# Altium PCB 100861.pcbdoc (part 1 of 2)
Units mm, origin at the board's own origin, x right, y up, seen from the top; angles counter-clockwise.
Board outline 64 x 17.5 mm, 4 copper layers (Top Layer, Ground, Power, Bottom Layer), stack 1.551 mm thick; 99 components, 69 nets, 422 pads, 178 vias.
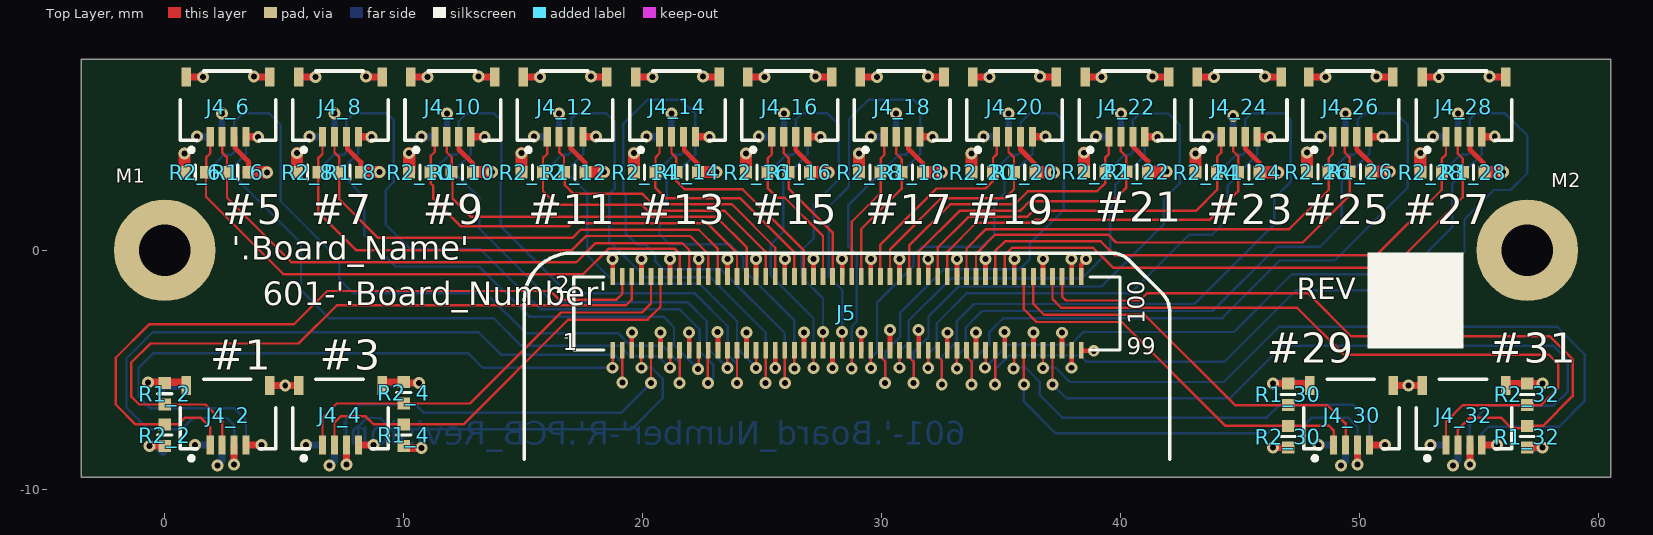
[diagram p0: Top Layer view]
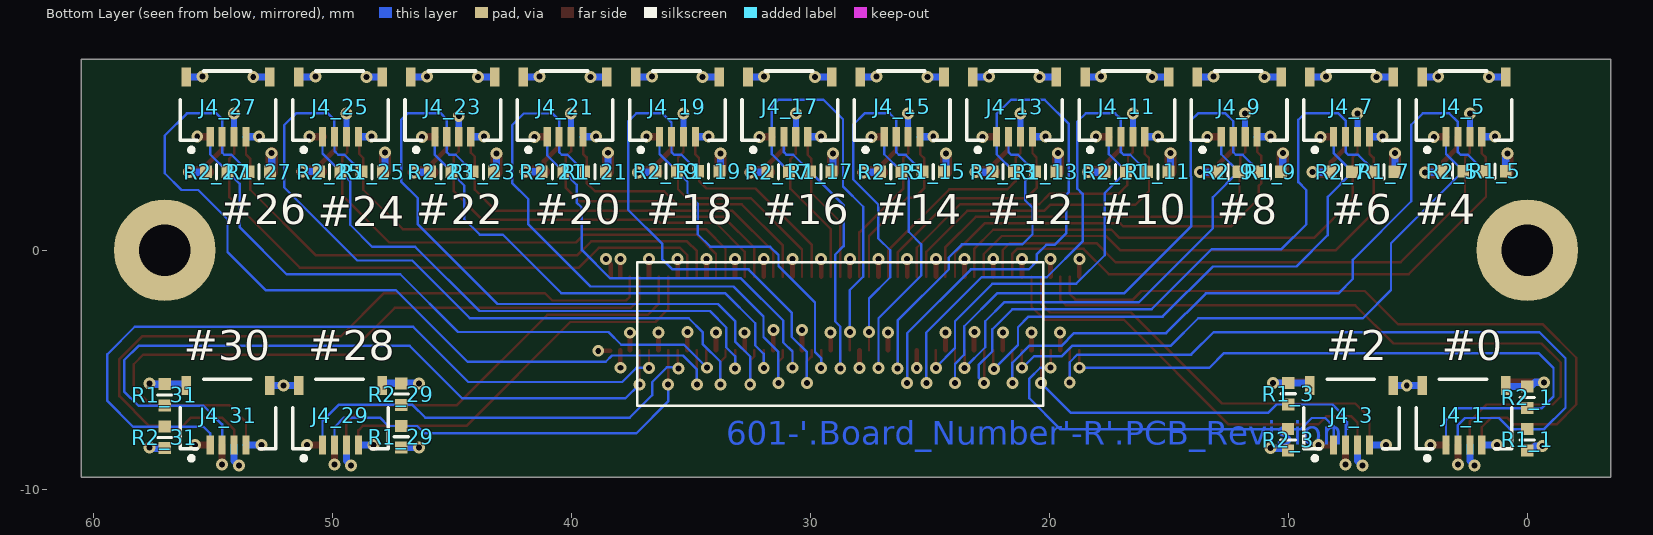
[diagram p1: Bottom Layer view, seen from below]
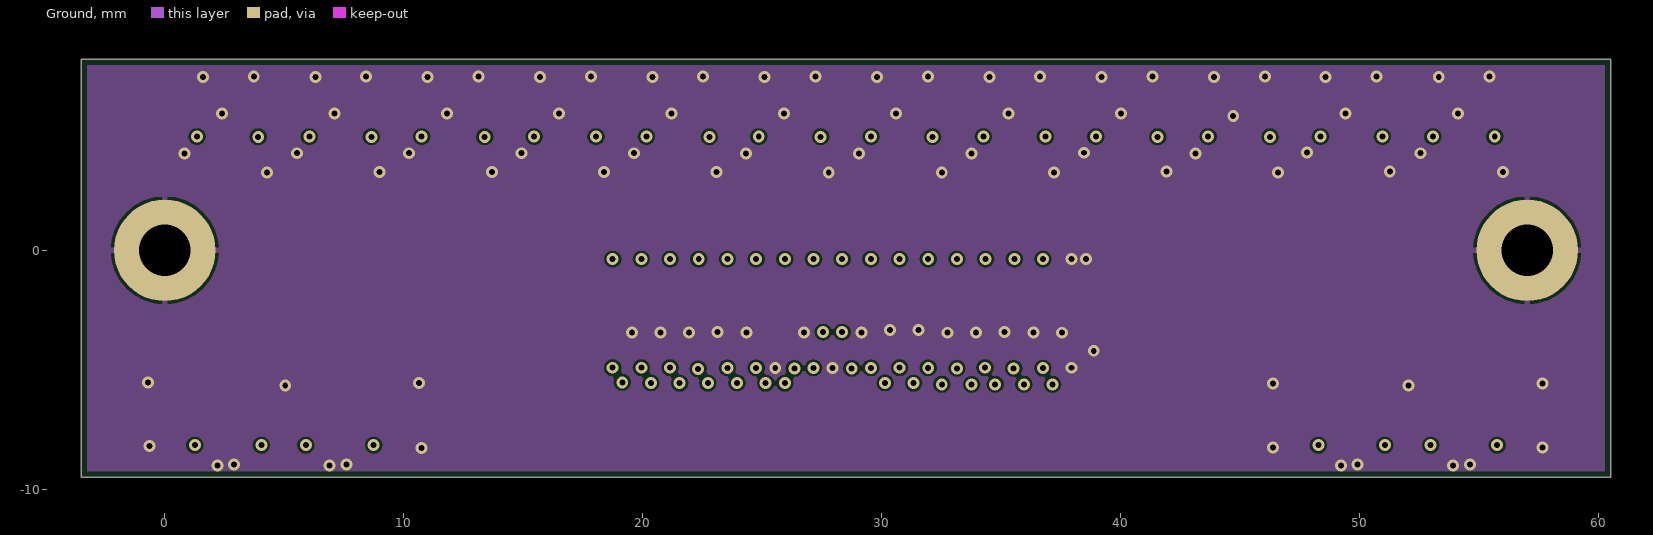
[diagram p2: Ground]
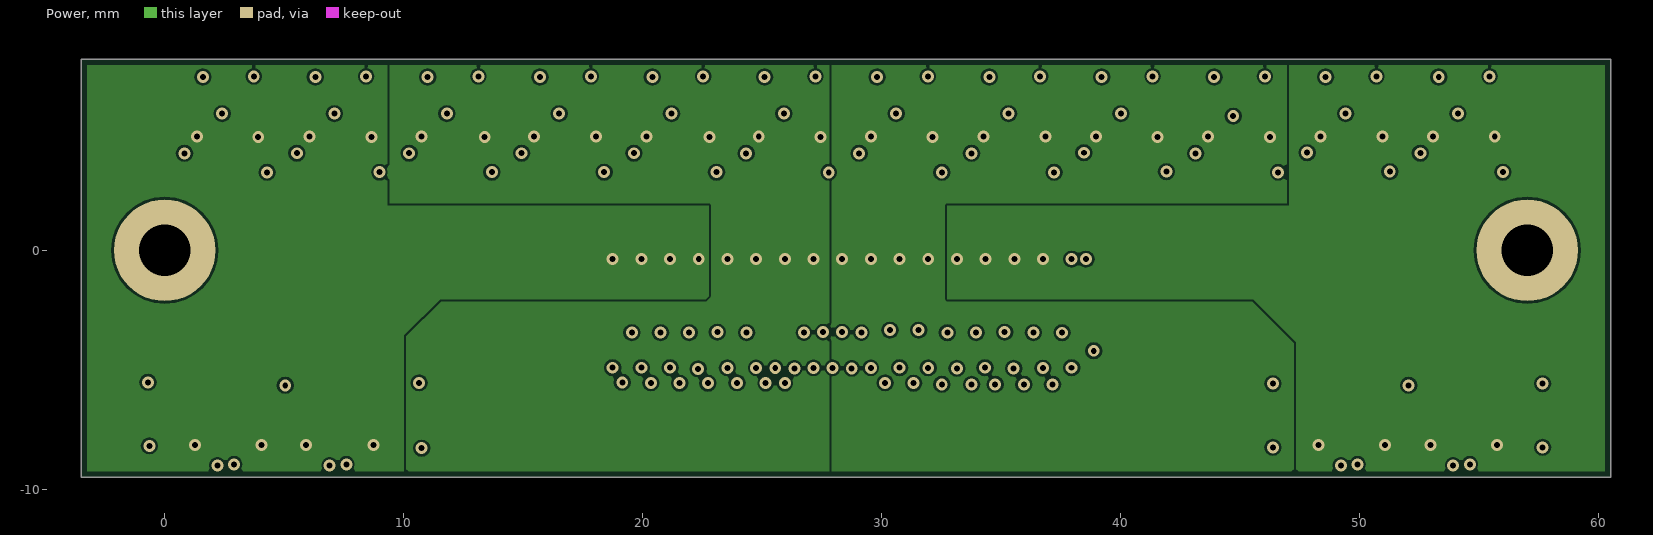
[diagram p3: Power]

## Layer stack, top to bottom
Top Solder: solder mask 0.0102, Solder Resist, Dk 3.5
Top Layer: signal copper 0.0356
Dielectric 1: core 0.254, FR-4, Dk 4.2
Ground: signal copper 0.036
Dielectric 3: prepreg 0.9, Dk 4.2
Power: signal copper 0.036
Dielectric 2: core 0.254, Dk 4.2
Bottom Layer: signal copper 0.0356
Bottom Solder: solder mask 0.0102, Solder Resist, Dk 3.5

## Board outline
-3.5,-9.5 60.5,-9.5 60.5,8 -3.5,8

## Design rules (kind name [scope] priority, off if disabled: settings)
AssemblyTestPointUsage [All] p1 off:
AssemblyTestpoint [All] p1 off: testpointundercomponent=TRUE minsize=1.016 maxsize=2.54 preferedsize=1.524 minholesize=0 maxholesize=1.016 preferedholesize=0.813 testpointgrid=0.025 usegrid=TRUE gridtolerance=0 allowsidetop=TRUE allowsidebottom=TRUE
BoardOutlineClearance [All] p1: gap=0.25 except(0: Text-OutlineEdge)
Clearance Clearance_1 [InNamedPolygon('VCC_3V3_CORE') vs InNet('GND')] p1: gap=0.254
Clearance PWR [OnLayer('Power')] p2: gap=0.2
Clearance ANT_PIN [InPadClass('RADIO_PIN')] p3: gap=0.25
Clearance Keepout_clear [IsKeepOut vs OnLayer('Top Layer')] p4: gap=0
Clearance Polygon_Clearance [InPolygon] p5: gap=0.1
Clearance Narrow_clearance [InNetClass('Narrow')] p6: gap=0.08
Clearance RF_Clearance [InNetClass('RF')] p7: gap=0.125
Clearance [All] p8: gap=0.1 except(0: Arc-Region Track-Region SMDPad-Region THPad-Region Via-Region Fill-Region Region-Region)
ComponentClearance [All] p1: gap=0.18 collisioncheckmode=3 verticalgap=0.18 showdistances=FALSE
DiffPairsRouting [All] p1: maxlimit=0.152 minlimit=0.152 mostfreqgap=0.152 toplayer_minwidth=0.25 toplayer_maxwidth=0.318 toplayer_prefwidth=0.318 midlayer1_minwidth=0.25 midlayer1_maxwidth=0.318 midlayer1_prefwidth=0.318 midlayer2_minwidth=0.25 midlayer2_maxwidth=0.318 midlayer2_prefwidth=0.318 bottomlayer_minwidth=0.25 bottomlayer_maxwidth=0.318 bottomlayer_prefwidth=0.318 maxuncoupledlength=12.7
FabricationTestPointUsage [All] p1 off: valid=0 allowmultiple=FALSE
FabricationTestpoint [All] p1 off: side=3 testpointundercomponent=TRUE minsize=1.016 maxsize=2.54 preferedsize=1.524 minholesize=0 maxholesize=1.016 preferedholesize=0.813 testpointgrid=0.025 allowsidetop=TRUE allowsidebottom=TRUE usegrid=TRUE gridtolerance=0
HoleSize [All] p1: absolutevalues=TRUE maxlimit=3.5 minlimit=0.025 maxpercent=80.000 minpercent=20.000
MinimumSolderMaskSliver MinimumSolderMaskSliver_1 [isvia vs IsPad] p1: minsoldermaskwidth=0
MinimumSolderMaskSliver [All] p2: minsoldermaskwidth=0.05
PlaneClearance [All] p1: clearance=0.25
PlaneConnect [All] p1: planeconnectstyle=Direct reliefexpansion=0.508 reliefentries=4 reliefconductorwidth=0.254 reliefairgap=0.254
PolygonConnect MTG_CONNECT [HasFootprint('standoff_hole2p50p')] p1: connectstyle=Relief reliefconductorwidth=0.4 reliefentries=4 polygonreliefangle="90 Angle" airgapwidth=0.25
PolygonConnect THPin [All vs InPadClass('THPin_Polygon')] p2: connectstyle=Relief reliefconductorwidth=0.254 reliefentries=4 polygonreliefangle="90 Angle" airgapwidth=0.254
PolygonConnect POLY_VIA [IsVia vs IsPolygon] p3: connectstyle=Direct reliefconductorwidth=0.254 reliefentries=4 polygonreliefangle="90 Angle" airgapwidth=0.254
PolygonConnect [All] p4: connectstyle=Relief reliefconductorwidth=0.25 reliefentries=4 polygonreliefangle="90 Angle" airgapwidth=0.125
RoomDefinition U_SensorConn320 [InComponentClass('U_SensorConn320')] p1: confinementstyle=ConfineIn formatcopy=TRUE lockcomponents=FALSE outline -388.768,-211.633 -337.968,-211.633 -337.968,-186.233 -388.768,-186.233
RoomDefinition SensorBreakout [InComponentClass('SensorBreakout')] p2: confinementstyle=ConfineIn formatcopy=TRUE lockcomponents=FALSE outline -388.768,-211.633 -337.968,-211.633 -337.968,-186.233 -388.768,-186.233
RoomDefinition U_SensorConn432 [InComponentClass('U_SensorConn432')] p3: confinementstyle=ConfineIn formatcopy=TRUE lockcomponents=FALSE outline -388.768,-211.633 -337.968,-211.633 -337.968,-186.233 -388.768,-186.233
RoomDefinition U_SensorConn431 [InComponentClass('U_SensorConn431')] p4: confinementstyle=ConfineIn formatcopy=TRUE lockcomponents=FALSE outline -388.768,-211.633 -337.968,-211.633 -337.968,-186.233 -388.768,-186.233
RoomDefinition U_SensorConn430 [InComponentClass('U_SensorConn430')] p5: confinementstyle=ConfineIn formatcopy=TRUE lockcomponents=FALSE outline -388.768,-211.633 -337.968,-211.633 -337.968,-186.233 -388.768,-186.233
RoomDefinition U_SensorConn429 [InComponentClass('U_SensorConn429')] p6: confinementstyle=ConfineIn formatcopy=TRUE lockcomponents=FALSE outline -388.768,-211.633 -337.968,-211.633 -337.968,-186.233 -388.768,-186.233
RoomDefinition U_SensorConn428 [InComponentClass('U_SensorConn428')] p7: confinementstyle=ConfineIn formatcopy=TRUE lockcomponents=FALSE outline -388.768,-211.633 -337.968,-211.633 -337.968,-186.233 -388.768,-186.233
RoomDefinition U_SensorConn427 [InComponentClass('U_SensorConn427')] p8: confinementstyle=ConfineIn formatcopy=TRUE lockcomponents=FALSE outline -388.768,-211.633 -337.968,-211.633 -337.968,-186.233 -388.768,-186.233
RoomDefinition U_SensorConn426 [InComponentClass('U_SensorConn426')] p9: confinementstyle=ConfineIn formatcopy=TRUE lockcomponents=FALSE outline -388.768,-211.633 -337.968,-211.633 -337.968,-186.233 -388.768,-186.233
RoomDefinition U_SensorConn425 [InComponentClass('U_SensorConn425')] p10: confinementstyle=ConfineIn formatcopy=TRUE lockcomponents=FALSE outline -388.768,-211.633 -337.968,-211.633 -337.968,-186.233 -388.768,-186.233
RoomDefinition U_SensorConn324 [InComponentClass('U_SensorConn324')] p11: confinementstyle=ConfineIn formatcopy=TRUE lockcomponents=FALSE outline -388.768,-211.633 -337.968,-211.633 -337.968,-186.233 -388.768,-186.233
RoomDefinition U_SensorConn323 [InComponentClass('U_SensorConn323')] p12: confinementstyle=ConfineIn formatcopy=TRUE lockcomponents=FALSE outline -388.768,-211.633 -337.968,-211.633 -337.968,-186.233 -388.768,-186.233
RoomDefinition U_SensorConn322 [InComponentClass('U_SensorConn322')] p13: confinementstyle=ConfineIn formatcopy=TRUE lockcomponents=FALSE outline -388.768,-211.633 -337.968,-211.633 -337.968,-186.233 -388.768,-186.233
RoomDefinition U_SensorConn321 [InComponentClass('U_SensorConn321')] p14: confinementstyle=ConfineIn formatcopy=TRUE lockcomponents=FALSE outline -388.768,-211.633 -337.968,-211.633 -337.968,-186.233 -388.768,-186.233
RoomDefinition U_SensorConn319 [InComponentClass('U_SensorConn319')] p15: confinementstyle=ConfineIn formatcopy=TRUE lockcomponents=FALSE outline -388.768,-211.633 -337.968,-211.633 -337.968,-186.233 -388.768,-186.233
RoomDefinition U_SensorConn318 [InComponentClass('U_SensorConn318')] p16: confinementstyle=ConfineIn formatcopy=TRUE lockcomponents=FALSE outline -388.768,-211.633 -337.968,-211.633 -337.968,-186.233 -388.768,-186.233
RoomDefinition U_SensorConn317 [InComponentClass('U_SensorConn317')] p17: confinementstyle=ConfineIn formatcopy=TRUE lockcomponents=FALSE outline -388.768,-211.633 -337.968,-211.633 -337.968,-186.233 -388.768,-186.233
RoomDefinition U_SensorConn216 [InComponentClass('U_SensorConn216')] p18: confinementstyle=ConfineIn formatcopy=TRUE lockcomponents=FALSE outline -388.768,-211.633 -337.968,-211.633 -337.968,-186.233 -388.768,-186.233
RoomDefinition U_SensorConn215 [InComponentClass('U_SensorConn215')] p19: confinementstyle=ConfineIn formatcopy=TRUE lockcomponents=FALSE outline -388.768,-211.633 -337.968,-211.633 -337.968,-186.233 -388.768,-186.233
RoomDefinition U_SensorConn214 [InComponentClass('U_SensorConn214')] p20: confinementstyle=ConfineIn formatcopy=TRUE lockcomponents=FALSE outline -388.768,-211.633 -337.968,-211.633 -337.968,-186.233 -388.768,-186.233
RoomDefinition U_SensorConn213 [InComponentClass('U_SensorConn213')] p21: confinementstyle=ConfineIn formatcopy=TRUE lockcomponents=FALSE outline -388.768,-211.633 -337.968,-211.633 -337.968,-186.233 -388.768,-186.233
RoomDefinition U_SensorConn212 [InComponentClass('U_SensorConn212')] p22: confinementstyle=ConfineIn formatcopy=TRUE lockcomponents=FALSE outline -388.768,-211.633 -337.968,-211.633 -337.968,-186.233 -388.768,-186.233
RoomDefinition U_SensorConn211 [InComponentClass('U_SensorConn211')] p23: confinementstyle=ConfineIn formatcopy=TRUE lockcomponents=FALSE outline -388.768,-211.633 -337.968,-211.633 -337.968,-186.233 -388.768,-186.233
RoomDefinition U_SensorConn210 [InComponentClass('U_SensorConn210')] p24: confinementstyle=ConfineIn formatcopy=TRUE lockcomponents=FALSE outline -388.768,-211.633 -337.968,-211.633 -337.968,-186.233 -388.768,-186.233
RoomDefinition U_SensorConn29 [InComponentClass('U_SensorConn29')] p25: confinementstyle=ConfineIn formatcopy=TRUE lockcomponents=FALSE outline -388.768,-211.633 -337.968,-211.633 -337.968,-186.233 -388.768,-186.233
RoomDefinition U_SensorConn18 [InComponentClass('U_SensorConn18')] p26: confinementstyle=ConfineIn formatcopy=TRUE lockcomponents=FALSE outline -388.768,-211.633 -337.968,-211.633 -337.968,-186.233 -388.768,-186.233
RoomDefinition U_SensorConn17 [InComponentClass('U_SensorConn17')] p27: confinementstyle=ConfineIn formatcopy=TRUE lockcomponents=FALSE outline -388.768,-211.633 -337.968,-211.633 -337.968,-186.233 -388.768,-186.233
RoomDefinition U_SensorConn16 [InComponentClass('U_SensorConn16')] p28: confinementstyle=ConfineIn formatcopy=TRUE lockcomponents=FALSE outline -388.768,-211.633 -337.968,-211.633 -337.968,-186.233 -388.768,-186.233
RoomDefinition U_SensorConn15 [InComponentClass('U_SensorConn15')] p29: confinementstyle=ConfineIn formatcopy=TRUE lockcomponents=FALSE outline -388.768,-211.633 -337.968,-211.633 -337.968,-186.233 -388.768,-186.233
RoomDefinition U_SensorConn14 [InComponentClass('U_SensorConn14')] p30: confinementstyle=ConfineIn formatcopy=TRUE lockcomponents=FALSE outline -388.768,-211.633 -337.968,-211.633 -337.968,-186.233 -388.768,-186.233
RoomDefinition U_SensorConn13 [InComponentClass('U_SensorConn13')] p31: confinementstyle=ConfineIn formatcopy=TRUE lockcomponents=FALSE outline -388.768,-211.633 -337.968,-211.633 -337.968,-186.233 -388.768,-186.233
RoomDefinition U_SensorConn12 [InComponentClass('U_SensorConn12')] p32: confinementstyle=ConfineIn formatcopy=TRUE lockcomponents=FALSE outline -388.768,-211.633 -337.968,-211.633 -337.968,-186.233 -388.768,-186.233
RoomDefinition U_SensorConn11 [InComponentClass('U_SensorConn11')] p33: confinementstyle=ConfineIn formatcopy=TRUE lockcomponents=FALSE outline -388.768,-211.633 -337.968,-211.633 -337.968,-186.233 -388.768,-186.233
RoutingVias [All] p1: holewidth=0.25 width=0.5 viastyle="Through Hole" minholewidth=0.25 minwidth=0.5 maxholewidth=0.25 maxwidth=0.5 useviatemplates=TRUE viatemplateguid#1={2D41CD12-448D-474D-BA40-36D4687D2B42} viatemplatename#1=v50h25m0mx0
SilkToSilkClearance [All] p1 off: silktosilkclearance=0
SilkToSolderMaskClearance [IsPad] p1: minsilkscreentomaskgap=0.05 clearancetoexposedcopper=TRUE
SolderMaskExpansion [All] p1: expansion=0.05
Width Narrow [InNetClass('Narrow')] p1: maxlimit=0.1 minlimit=0.08 preferedwidth=0.1
Width RF_Width [InNetClass('RF')] p2: maxlimit=0.59 minlimit=0.2 preferedwidth=0.59
Width PWR_GND [InNetClass('PWR_GND')] p3: maxlimit=1 minlimit=0.2 preferedwidth=0.3
Width CRITICAL [InNetClass('MOTOR_DRIVERS')] p4: maxlimit=0.4 minlimit=0.3 preferedwidth=0.4
Width [All] p5: maxlimit=0.508 minlimit=0.1 preferedwidth=0.1
18 further rules are at their usual default settings.

## Classes and differential pairs
component class U_SensorConn11: J4_1 R1_1 R2_1
component class U_SensorConn12: J4_2 R1_2 R2_2
component class U_SensorConn13: J4_3 R1_3 R2_3
component class U_SensorConn14: J4_4 R1_4 R2_4
component class U_SensorConn15: J4_5 R1_5 R2_5
component class U_SensorConn16: J4_6 R1_6 R2_6
component class U_SensorConn17: J4_7 R1_7 R2_7
component class U_SensorConn18: J4_8 R1_8 R2_8
component class U_SensorConn29: J4_9 R1_9 R2_9
component class U_SensorConn210: J4_10 R1_10 R2_10
component class U_SensorConn211: J4_11 R1_11 R2_11
component class U_SensorConn212: J4_12 R1_12 R2_12
component class U_SensorConn213: J4_13 R1_13 R2_13
component class U_SensorConn214: J4_14 R1_14 R2_14
component class U_SensorConn215: J4_15 R1_15 R2_15
component class U_SensorConn216: J4_16 R1_16 R2_16
component class U_SensorConn317: J4_17 R1_17 R2_17
component class U_SensorConn318: J4_18 R1_18 R2_18
component class U_SensorConn319: J4_19 R1_19 R2_19
component class U_SensorConn320: J4_20 R1_20 R2_20
component class U_SensorConn321: J4_21 R1_21 R2_21
component class U_SensorConn322: J4_22 R1_22 R2_22
component class U_SensorConn323: J4_23 R1_23 R2_23
component class U_SensorConn324: J4_24 R1_24 R2_24
component class U_SensorConn425: J4_25 R1_25 R2_25
component class U_SensorConn426: J4_26 R1_26 R2_26
component class U_SensorConn427: J4_27 R1_27 R2_27
component class U_SensorConn428: J4_28 R1_28 R2_28
component class U_SensorConn429: J4_29 R1_29 R2_29
component class U_SensorConn430: J4_30 R1_30 R2_30
component class U_SensorConn431: J4_31 R1_31 R2_31
component class U_SensorConn432: J4_32 R1_32 R2_32
net class SENSOR_A[1..32]: SENSOR_A1 SENSOR_A2 SENSOR_A3 SENSOR_A4 SENSOR_A5 SENSOR_A6 SENSOR_A7 SENSOR_A8 SENSOR_A9 SENSOR_A10 SENSOR_A11 SENSOR_A12 SENSOR_A13 SENSOR_A14 SENSOR_A15 SENSOR_A16 SENSOR_A17 SENSOR_A18 SENSOR_A19 SENSOR_A20 SENSOR_A21 SENSOR_A22 SENSOR_A23 SENSOR_A24 SENSOR_A25 SENSOR_A26 SENSOR_A27 SENSOR_A28 SENSOR_A29 SENSOR_A30 SENSOR_A31 SENSOR_A32
net class SENSOR_B[1..32]: SENSOR_B1 SENSOR_B2 SENSOR_B3 SENSOR_B4 SENSOR_B5 SENSOR_B6 SENSOR_B7 SENSOR_B8 SENSOR_B9 SENSOR_B10 SENSOR_B11 SENSOR_B12 SENSOR_B13 SENSOR_B14 SENSOR_B15 SENSOR_B16 SENSOR_B17 SENSOR_B18 SENSOR_B19 SENSOR_B20 SENSOR_B21 SENSOR_B22 SENSOR_B23 SENSOR_B24 SENSOR_B25 SENSOR_B26 SENSOR_B27 SENSOR_B28 SENSOR_B29 SENSOR_B30 SENSOR_B31 SENSOR_B32
net class SENSOR_VCC[1..4]: SENSOR_VCC1 SENSOR_VCC2 SENSOR_VCC3 SENSOR_VCC4
channel class SensorConn: U_SensorConn11 U_SensorConn12 U_SensorConn13 U_SensorConn14 U_SensorConn15 U_SensorConn16 U_SensorConn17 U_SensorConn18 U_SensorConn29 U_SensorConn210 U_SensorConn211 U_SensorConn212 U_SensorConn213 U_SensorConn214 U_SensorConn215 U_SensorConn216 U_SensorConn317 U_SensorConn318 U_SensorConn319 U_SensorConn320 U_SensorConn321 U_SensorConn322 U_SensorConn323 U_SensorConn324 U_SensorConn425 U_SensorConn426 U_SensorConn427 U_SensorConn428 U_SensorConn429 U_SensorConn430 U_SensorConn431 U_SensorConn432
component class SensorBreakout: J5 M1 M2

## Components (designator, comment, footprint, x,y, rotation, side; value= is the part's Value field where it differs from the comment)
J4_1 "FH34S-4S-0.5SH" con_hirose_FH34SRJ-4S 2.65,-5.4 r180 bottom (schematic designator J4)
J4_2 "FH34S-4S-0.5SH" con_hirose_FH34SRJ-4S 2.65,-5.4 r0 top (schematic designator J4)
J4_3 "FH34S-4S-0.5SH" con_hirose_FH34SRJ-4S 7.35,-5.4 r180 bottom (schematic designator J4)
J4_4 "FH34S-4S-0.5SH" con_hirose_FH34SRJ-4S 7.35,-5.4 r0 top (schematic designator J4)
J4_5 "FH34S-4S-0.5SH" con_hirose_FH34SRJ-4S 2.65,7.5 r180 bottom (schematic designator J4)
J4_6 "FH34S-4S-0.5SH" con_hirose_FH34SRJ-4S 2.65,7.5 r0 top (schematic designator J4)
J4_7 "FH34S-4S-0.5SH" con_hirose_FH34SRJ-4S 7.35,7.5 r180 bottom (schematic designator J4)
J4_8 "FH34S-4S-0.5SH" con_hirose_FH34SRJ-4S 7.35,7.5 r0 top (schematic designator J4)
J4_9 "FH34S-4S-0.5SH" con_hirose_FH34SRJ-4S 12.05,7.5 r180 bottom (schematic designator J4)
J4_10 "FH34S-4S-0.5SH" con_hirose_FH34SRJ-4S 12.05,7.5 r0 top (schematic designator J4)
J4_11 "FH34S-4S-0.5SH" con_hirose_FH34SRJ-4S 16.75,7.5 r180 bottom (schematic designator J4)
J4_12 "FH34S-4S-0.5SH" con_hirose_FH34SRJ-4S 16.75,7.5 r0 top (schematic designator J4)
J4_13 "FH34S-4S-0.5SH" con_hirose_FH34SRJ-4S 21.45,7.5 r180 bottom (schematic designator J4)
J4_14 "FH34S-4S-0.5SH" con_hirose_FH34SRJ-4S 21.45,7.5 r0 top (schematic designator J4)
J4_15 "FH34S-4S-0.5SH" con_hirose_FH34SRJ-4S 26.15,7.5 r180 bottom (schematic designator J4)
J4_16 "FH34S-4S-0.5SH" con_hirose_FH34SRJ-4S 26.147,7.5 r0 top (schematic designator J4)
J4_17 "FH34S-4S-0.5SH" con_hirose_FH34SRJ-4S 30.85,7.5 r180 bottom (schematic designator J4)
J4_18 "FH34S-4S-0.5SH" con_hirose_FH34SRJ-4S 30.85,7.5 r0 top (schematic designator J4)
J4_19 "FH34S-4S-0.5SH" con_hirose_FH34SRJ-4S 35.55,7.5 r180 bottom (schematic designator J4)
J4_20 "FH34S-4S-0.5SH" con_hirose_FH34SRJ-4S 35.55,7.5 r0 top (schematic designator J4)
J4_21 "FH34S-4S-0.5SH" con_hirose_FH34SRJ-4S 40.25,7.5 r180 bottom (schematic designator J4)
J4_22 "FH34S-4S-0.5SH" con_hirose_FH34SRJ-4S 40.25,7.5 r0 top (schematic designator J4)
J4_23 "FH34S-4S-0.5SH" con_hirose_FH34SRJ-4S 44.95,7.5 r180 bottom (schematic designator J4)
J4_24 "FH34S-4S-0.5SH" con_hirose_FH34SRJ-4S 44.95,7.5 r0 top (schematic designator J4)
J4_25 "FH34S-4S-0.5SH" con_hirose_FH34SRJ-4S 49.65,7.5 r180 bottom (schematic designator J4)
J4_26 "FH34S-4S-0.5SH" con_hirose_FH34SRJ-4S 49.616,7.5 r0 top (schematic designator J4)
J4_27 "FH34S-4S-0.5SH" con_hirose_FH34SRJ-4S 54.35,7.5 r180 bottom (schematic designator J4)
J4_28 "FH34S-4S-0.5SH" con_hirose_FH34SRJ-4S 54.35,7.5 r0 top (schematic designator J4)
J4_29 "FH34S-4S-0.5SH" con_hirose_FH34SRJ-4S 49.65,-5.4 r180 bottom (schematic designator J4)
J4_30 "FH34S-4S-0.5SH" con_hirose_FH34SRJ-4S 49.65,-5.4 r0 top (schematic designator J4)
J4_31 "FH34S-4S-0.5SH" con_hirose_FH34SRJ-4S 54.35,-5.4 r180 bottom (schematic designator J4)
J4_32 "FH34S-4S-0.5SH" con_hirose_FH34SRJ-4S 54.35,-5.4 r0 top (schematic designator J4)
J5 "DF40HC(3.0)-100DS-0.4V" con100_hirose-df40c-100ds_129h 28.54,-2.64 r180 top locked
M1 "MTGC425H215P" MTGC425H215P 0,0 r0 top
M2 "MTGC425H215P" MTGC425H215P 57,0 r0 top
R1_1 "10K" 0402-IPCsm_40 0,-7.928 r90 bottom (schematic designator R1)
R1_2 "10K" 0402-IPCsm_40 0,-6 r270 top (schematic designator R1)
R1_3 "10K" 0402-IPCsm_40 10,-6 r270 bottom (schematic designator R1)
R1_4 "10K" 0402-IPCsm_40 9.997,-7.734 r90 top (schematic designator R1)
R1_5 "10K" 0402-IPCsm_40 1.35,3.315 r0 bottom (schematic designator R1)
R1_6 "10K" 0402-IPCsm_40 3.054,3.265 r180 top (schematic designator R1)
R1_7 "10K" 0402-IPCsm_40 6,3.294 r0 bottom (schematic designator R1)
R1_8 "10K" 0402-IPCsm_40 7.754,3.269 r180 top (schematic designator R1)
R1_9 "10K" 0402-IPCsm_40 10.75,3.294 r0 bottom (schematic designator R1)
R1_10 "10K" 0402-IPCsm_40 12.454,3.269 r180 top (schematic designator R1)
R1_11 "10K" 0402-IPCsm_40 15.45,3.294 r0 bottom (schematic designator R1)
R1_12 "10K" 0402-IPCsm_40 17.154,3.269 r180 top (schematic designator R1)
R1_13 "10K" 0402-IPCsm_40 20.15,3.294 r0 bottom (schematic designator R1)
R1_14 "10K" 0402-IPCsm_40 21.854,3.269 r180 top (schematic designator R1)
R1_15 "10K" 0402-IPCsm_40 24.85,3.294 r0 bottom (schematic designator R1)
R1_16 "10K" 0402-IPCsm_40 26.55,3.265 r180 top (schematic designator R1)
R1_17 "10K" 0402-IPCsm_40 29.55,3.294 r0 bottom (schematic designator R1)
R1_18 "10K" 0402-IPCsm_40 31.279,3.265 r180 top (schematic designator R1)
R1_19 "10K" 0402-IPCsm_40 34.25,3.315 r0 bottom (schematic designator R1)
R1_20 "10K" 0402-IPCsm_40 35.979,3.265 r180 top (schematic designator R1)
R1_21 "10K" 0402-IPCsm_40 39,3.294 r0 bottom (schematic designator R1)
R1_22 "10K" 0402-IPCsm_40 40.679,3.29 r180 top (schematic designator R1)
R1_23 "10K" 0402-IPCsm_40 43.672,3.294 r0 bottom (schematic designator R1)
R1_24 "10K" 0402-IPCsm_40 45.354,3.265 r180 top (schematic designator R1)
R1_25 "10K" 0402-IPCsm_40 48.322,3.294 r0 bottom (schematic designator R1)
R1_26 "10K" 0402-IPCsm_40 50.02,3.294 r180 top (schematic designator R1)
R1_27 "10K" 0402-IPCsm_40 53.054,3.294 r0 bottom (schematic designator R1)
R1_28 "10K" 0402-IPCsm_40 54.754,3.269 r180 top (schematic designator R1)
R1_29 "10K" 0402-IPCsm_40 47.105,-7.8 r90 bottom (schematic designator R1)
R1_30 "10K" 0402-IPCsm_40 47,-6.028 r270 top (schematic designator R1)
R1_31 "10K" 0402-IPCsm_40 57,-6.05 r270 bottom (schematic designator R1)
R1_32 "10K" 0402-IPCsm_40 57,-7.797 r90 top (schematic designator R1)
R2_1 "10K" 0402-IPCsm_40 0,-6.15 r270 bottom (schematic designator R2)
R2_2 "10K" 0402-IPCsm_40 0,-7.734 r90 top (schematic designator R2)
R2_3 "10K" 0402-IPCsm_40 10.008,-7.928 r90 bottom (schematic designator R2)
R2_4 "10K" 0402-IPCsm_40 9.997,-5.956 r270 top (schematic designator R2)
R2_5 "10K" 0402-IPCsm_40 3.128,3.315 r180 bottom (schematic designator R2)
R2_6 "10K" 0402-IPCsm_40 1.276,3.265 r0 top (schematic designator R2)
R2_7 "10K" 0402-IPCsm_40 7.778,3.294 r180 bottom (schematic designator R2)
R2_8 "10K" 0402-IPCsm_40 5.976,3.269 r0 top (schematic designator R2)
R2_9 "10K" 0402-IPCsm_40 12.528,3.294 r180 bottom (schematic designator R2)
R2_10 "10K" 0402-IPCsm_40 10.676,3.269 r0 top (schematic designator R2)
R2_11 "10K" 0402-IPCsm_40 17.228,3.294 r180 bottom (schematic designator R2)
R2_12 "10K" 0402-IPCsm_40 15.376,3.269 r0 top (schematic designator R2)
R2_13 "10K" 0402-IPCsm_40 21.928,3.294 r180 bottom (schematic designator R2)
R2_14 "10K" 0402-IPCsm_40 20.076,3.269 r0 top (schematic designator R2)
R2_15 "10K" 0402-IPCsm_40 26.628,3.294 r180 bottom (schematic designator R2)
R2_16 "10K" 0402-IPCsm_40 24.772,3.265 r0 top (schematic designator R2)
R2_17 "10K" 0402-IPCsm_40 31.328,3.294 r180 bottom (schematic designator R2)
R2_18 "10K" 0402-IPCsm_40 29.501,3.265 r0 top (schematic designator R2)
R2_19 "10K" 0402-IPCsm_40 36.028,3.315 r180 bottom (schematic designator R2)
R2_20 "10K" 0402-IPCsm_40 34.201,3.265 r0 top (schematic designator R2)
R2_21 "10K" 0402-IPCsm_40 40.778,3.294 r180 bottom (schematic designator R2)
R2_22 "10K" 0402-IPCsm_40 38.901,3.29 r0 top (schematic designator R2)
R2_23 "10K" 0402-IPCsm_40 45.45,3.294 r180 bottom (schematic designator R2)
R2_24 "10K" 0402-IPCsm_40 43.576,3.265 r0 top (schematic designator R2)
R2_25 "10K" 0402-IPCsm_40 50.1,3.294 r180 bottom (schematic designator R2)
R2_26 "10K" 0402-IPCsm_40 48.242,3.294 r0 top (schematic designator R2)
R2_27 "10K" 0402-IPCsm_40 54.832,3.294 r180 bottom (schematic designator R2)
R2_28 "10K" 0402-IPCsm_40 52.976,3.269 r0 top (schematic designator R2)
R2_29 "10K" 0402-IPCsm_40 47.105,-6.014 r270 bottom (schematic designator R2)
R2_30 "10K" 0402-IPCsm_40 47,-7.797 r90 top (schematic designator R2)
R2_31 "10K" 0402-IPCsm_40 57,-7.828 r90 bottom (schematic designator R2)
R2_32 "10K" 0402-IPCsm_40 57,-6.028 r270 top (schematic designator R2)

## Footprints (in the part's own frame and the unit in brackets; to place one, negate y for a bottom-side part, rotate by r counter-clockwise, add the part's x,y. Pads: shape width x height; smd on the part's side, far side on the other; paste and mask are expansions set on the pad)
0402-IPCsm_40 [mm] "0402-IPCSM_40"
  rect 0.5x0.52 smd: 1(-0.45,0) 2(0.45,0)
  silkscreen extent 0,-0.3 0,0.3, body extent -0.5,-0.2 0.5,0.2, height 0.4
con100_hirose-df40c-100ds_129h [mm] "CONN RCPT 100POS 0.4MM SMD GOLD"
  rect 0.2x0.7 smd mask+0.1: 1(9.8,1.54) 2(9.8,-1.54) 3(9.4,1.54) 4(9.4,-1.54) 5(9,1.54) 6(9,-1.54) 7(8.6,1.54) 8(8.6,-1.54) 9(8.2,1.54) 10(8.2,-1.54) 11(7.8,1.54) 12(7.8,-1.54) 13(7.4,1.54) 14(7.4,-1.54) 15(7,1.54) 16(7,-1.54) 17(6.6,1.54) 18(6.6,-1.54) 19(6.2,1.54) 20(6.2,-1.54) 21(5.8,1.54) 22(5.8,-1.54) 23(5.4,1.54) 24(5.4,-1.54) 25(5,1.54) 26(5,-1.54) 27(4.6,1.54) 28(4.6,-1.54) 29(4.2,1.54) 30(4.2,-1.54) 31(3.8,1.54) 32(3.8,-1.54) 33(3.4,1.54) 34(3.4,-1.54) 35(3,1.54) 36(3,-1.54) 37(2.6,1.54) 38(2.6,-1.54) 39(2.2,1.54) 40(2.2,-1.54) 41(1.8,1.54) 42(1.8,-1.54) 43(1.4,1.54) 44(1.4,-1.54) 45(1,1.54) 46(1,-1.54) 47(0.6,1.54) 48(0.6,-1.54) 49(0.2,1.54) 50(0.2,-1.54) 51(-0.2,1.54) 52(-0.2,-1.54) 53(-0.6,1.54) 54(-0.6,-1.54) 55(-1,1.54) 56(-1,-1.54) 57(-1.4,1.54) 58(-1.4,-1.54) 59(-1.8,1.54) 60(-1.8,-1.54) 61(-2.2,1.54) 62(-2.2,-1.54) 63(-2.6,1.54) 64(-2.6,-1.54) 65(-3,1.54) 66(-3,-1.54) 67(-3.4,1.54) 68(-3.4,-1.54) 69(-3.8,1.54) 70(-3.8,-1.54) 71(-4.2,1.54) 72(-4.2,-1.54) 73(-4.6,1.54) 74(-4.6,-1.54) 75(-5,1.54) 76(-5,-1.54) 77(-5.4,1.54) 78(-5.4,-1.54) 79(-5.8,1.54) 80(-5.8,-1.54) 81(-6.2,1.54) 82(-6.2,-1.54) 83(-6.6,1.54) 84(-6.6,-1.54) 85(-7,1.54) 86(-7,-1.54) 87(-7.4,1.54) 88(-7.4,-1.54) 89(-7.8,1.54) 90(-7.8,-1.54) 91(-8.2,1.54) 92(-8.2,-1.54) 93(-8.6,1.54) 94(-8.6,-1.54) 95(-9,1.54) 96(-9,-1.54) 97(-9.4,1.54) 98(-9.4,-1.54) 99(-9.8,1.54) 100(-9.8,-1.54)
  silkscreen extent -11.43,-1.52 11.81,1.52, body extent -11.4,-1.52 11.4,1.52, height 1.29
con_hirose_FH34SRJ-4S [mm] "CON_HIROSE_FH34SRJ-4S"
  rect 0.3x0.8 smd mask+0.05: 1(-0.75,-2.75) 2(-0.25,-2.75) 3(0.25,-2.75) 4(0.75,-2.75)
  rect 0.4x0.8 smd mask+0.05: 5(-1.75,-0.25) 6(1.75,-0.25)
  silkscreen extent -2,-3.39 2,0, body extent -2,-2.9 2,0, height 1.1
MTGC425H215P [mm] "MTGC425H215P"
  round 4.25 hole 2.15: 1(0,0)

## Part data
J4_1 J4_2 J4_3 J4_4 J4_5 J4_6 J4_7 J4_8 J4_9 J4_10 J4_11 J4_12 J4_13 J4_14 J4_15 J4_16 J4_17 J4_18 J4_19 J4_20 J4_21 J4_22 J4_23 J4_24 J4_25 J4_26 J4_27 J4_28 J4_29 J4_30 J4_31 J4_32: "CONN FFC FPC 4POS 0.50MM R/A"
J5: library part DF40HC(3.0)-100DS-0.4V(51), "CONN RCPT 100POS 0.4MM SMD GOLD 3.0MM"
M1 M2: "MTG, 4.25mm PAD, 2.15mm Plated Hole"
R1_1 R1_2 R1_3 R1_4 R1_5 R1_6 R1_7 R1_8 R1_9 R1_10 R1_11 R1_12 R1_13 R1_14 R1_15 R1_16 R1_17 R1_18 R1_19 R1_20 R1_21 R1_22 R1_23 R1_24 R1_25 R1_26 R1_27 R1_28 R1_29 R1_30 R1_31 R1_32 R2_1 R2_2 R2_3 R2_4 R2_5 R2_6 R2_7 R2_8 R2_9 R2_10 R2_11 R2_12 R2_13 R2_14 R2_15 R2_16 R2_17 R2_18 R2_19 R2_20 R2_21 R2_22 R2_23 R2_24 R2_25 R2_26 R2_27 R2_28 R2_29 R2_30 R2_31 R2_32: library part RC0402JR-0710KL, "RES 10.0K OHM 1/16W 5% 0402 SMD"

## Via types
v1: diameter 0.5, hole 0.25, Top Layer to Bottom Layer, tented both sides, 178 vias

## Nets (pads, with @x,y where several pads share a name; then routed paths per layer and width w, separated by ;. In a path a pad name is that pad's centre, name@x,y a point inside that pad or via, vN(x,y) a via of type N, cw(c..) or ccw(c..) an arc to the next point about the centre after c; other vN are vias at no path point)
GND: J4_1.3 J4_1.5 J4_1.6 J4_2.3 J4_2.5 J4_2.6 J4_3.3 J4_3.5 J4_3.6 J4_4.3 J4_4.5 J4_4.6 J4_5.3 J4_5.5 J4_5.6 J4_6.3 J4_6.5 J4_6.6 J4_7.3 J4_7.5 J4_7.6 J4_8.3 J4_8.5 J4_8.6 J4_9.3 J4_9.5 J4_9.6 J4_10.3 J4_10.5 J4_10.6 J4_11.3 J4_11.5 J4_11.6 J4_12.3 J4_12.5 J4_12.6 J4_13.3 J4_13.5 J4_13.6 J4_14.3 J4_14.5 J4_14.6 J4_15.3 J4_15.5 J4_15.6 J4_16.3 J4_16.5 J4_16.6 J4_17.3 J4_17.5 J4_17.6 J4_18.3 J4_18.5 J4_18.6 J4_19.3 J4_19.5 J4_19.6 J4_20.3 J4_20.5 J4_20.6 J4_21.3 J4_21.5 J4_21.6 J4_22.3 J4_22.5 J4_22.6 J4_23.3 J4_23.5 J4_23.6 J4_24.3 J4_24.5 J4_24.6 J4_25.3 J4_25.5 J4_25.6 J4_26.3 J4_26.5 J4_26.6 J4_27.3 J4_27.5 J4_27.6 J4_28.3 J4_28.5 J4_28.6 J4_29.3 J4_29.5 J4_29.6 J4_30.3 J4_30.5 J4_30.6 J4_31.3 J4_31.5 J4_31.6 J4_32.3 J4_32.5 J4_32.6 J5.5 J5.11 J5.17 J5.23 J5.29 J5.35 J5.41 J5.47 J5.53 J5.59 J5.65 J5.71 J5.77 J5.83 J5.89 J5.95 J5.97 J5.98 J5.99 J5.100 M1.1 M2.1 R1_1.1 R1_2.1 R1_3.1 R1_4.1 R1_5.1 R1_6.1 R1_7.1 R1_8.1 R1_9.1 R1_10.1 R1_11.1 R1_12.1 R1_13.1 R1_14.1 R1_15.1 R1_16.1 R1_17.1 R1_18.1 R1_19.1 R1_20.1 R1_21.1 R1_22.1 R1_23.1 R1_24.1 R1_25.1 R1_26.1 R1_27.1 R1_28.1 R1_29.1 R1_30.1 R1_31.1 R1_32.1 R2_1.1 R2_2.1 R2_3.1 R2_4.1 R2_5.1 R2_6.1 R2_7.1 R2_8.1 R2_9.1 R2_10.1 R2_11.1 R2_12.1 R2_13.1 R2_14.1 R2_15.1 R2_16.1 R2_17.1 R2_18.1 R2_19.1 R2_20.1 R2_21.1 R2_22.1 R2_23.1 R2_24.1 R2_25.1 R2_26.1 R2_27.1 R2_28.1 R2_29.1 R2_30.1 R2_31.1 R2_32.1 | length 147.7
  Top Layer w0.1: v1(23.115,-3.42) v1@23.14,-3.445 ; J5.99@38.34,-4.18 J5.99@38.362,-4.202
  Top Layer w0.2: J4_6.3@2.936,4.75 2.936,4.282 3.504,3.715 R1_6.1@3.504,3.265 ; J4_8.3@7.636,4.75 7.636,4.257 8.204,3.689 R1_8.1@8.204,3.269 ; J4_10.3@12.3,4.75 12.3,4.218 12.904,3.614 R1_10.1@12.904,3.269 ; J4_12.3@17,4.75 17,4.243 17.604,3.639 R1_12.1@17.604,3.269 ; J5.5@19.54,-4.18 v1(19.54,-3.44) ; J5.11@20.74,-4.18 20.736,-4.176 20.74,-4.172 v1(20.74,-3.44) ; J4_14.3@21.736,4.75 21.736,4.182 22.304,3.614 R1_14.1@22.304,3.269 ; J5.17@21.94,-4.18 v1(21.94,-3.44) ; J5.23@23.14,-4.18 v1@23.14,-3.445 ; J5.29@24.34,-4.18 v1(24.34,-3.44) ; v1(25.54,-4.92) J5.35@25.54,-4.18 ; J4_16.3@26.397,4.75 26.397,4.193 27,3.59 R1_16.1@27,3.265 ; J5.41@26.74,-4.18 v1(26.74,-3.44) ; v1(27.94,-4.92) J5.47@27.94,-4.18 ; J5.53@29.14,-4.18 v1(29.14,-3.44) ; J5.59@30.34,-4.18 v1(30.34,-3.335) ; J4_18.3@31.1,4.75 31.1,4.243 31.729,3.615 R1_18.1@31.729,3.265 ; J5.65@31.54,-4.18 v1(31.54,-3.335) ; J5.71@32.74,-4.18 v1(32.74,-3.448) ; J5.77@33.94,-4.18 v1(33.94,-3.44) ; J5.83@35.14,-4.18 v1(35.14,-3.42) ; J4_20.3@35.8,4.75 35.8,4.218 36.429,3.59 R1_20.1@36.429,3.265 ; J5.89@36.34,-4.18 v1(36.34,-3.44) ; J5.95@37.54,-4.18 v1(37.54,-3.448) ; v1(37.94,-4.912) J5.97@37.94,-4.18 ; J5.98@37.94,-1.1 v1(37.94,-0.368) ; J5.100@38.34,-1.1 38.34,-0.59 38.54,-0.39 v1(38.54,-0.368) ; J5.99@38.362,-4.202 v1(38.865,-4.202) ; J4_22.3@40.5,4.75 40.5,4.361 41.129,3.733 R1_22.1@41.129,3.29 ; J4_24.3@45.2,4.75 45.2,4.243 45.804,3.64 R1_24.1@45.804,3.265 ; J4_26.3@49.866,4.75 49.866,4.218 50.47,3.614 R1_26.1@50.47,3.294 ; J4_28.3@54.6,4.75 54.6,4.218 55.204,3.614 R1_28.1@55.204,3.269
  Top Layer w0.3: v1(-0.7,-5.522) 0.772,-5.522 J4_2.5@0.9,-5.65 ; v1(-0.641,-8.184) -0.266,-8.184 ; J4_6.5@0.9,7.25 v1(1.598,7.25) ; v1(2.9,-8.953) J4_2.3@2.9,-8.15 ; v1(3.724,7.276) 3.75,7.25 J4_6.6@4.4,7.25 ; J4_2.6@4.4,-5.65 v1(5.041,-5.65) J4_4.5@5.6,-5.65 ; J4_8.5@5.6,7.25 v1(6.298,7.25) ; v1(7.6,-8.953) J4_4.3@7.6,-8.15 ; v1(8.424,7.276) 8.45,7.25 J4_8.6@9.1,7.25 ; J4_4.6@9.1,-5.65 9.244,-5.506 R2_4.1@9.997,-5.506 10.038,-5.547 v1(10.638,-5.547) ; R1_4.1@9.997,-8.184 10.091,-8.278 v1(10.75,-8.278) ; J4_10.5@10.3,7.25 v1(10.998,7.25) ; v1(13.124,7.276) 13.15,7.25 J4_10.6@13.8,7.25 ; J4_12.5@15,7.25 v1(15.698,7.25) ; v1(17.824,7.276) 17.85,7.25 J4_12.6@18.5,7.25 ; J4_14.5@19.7,7.25 v1(20.398,7.25) ; v1(22.524,7.276) 22.55,7.25 J4_14.6@23.2,7.25 ; J4_16.5@24.397,7.25 v1(25.095,7.25) ; v1(27.221,7.276) 27.247,7.25 J4_16.6@27.897,7.25 ; J4_18.5@29.1,7.25 v1(29.798,7.25) ; v1(31.924,7.276) 31.95,7.25 J4_18.6@32.6,7.25 ; J4_20.5@33.8,7.25 v1(34.498,7.25) ; v1(36.624,7.276) 36.65,7.25 J4_20.6@37.3,7.25 ; J4_22.5@38.5,7.25 v1(39.198,7.25) ; v1(41.324,7.276) 41.35,7.25 J4_22.6@42,7.25 ; J4_24.5@43.2,7.25 v1(43.898,7.25) ; v1(46.024,7.276) 46.05,7.25 J4_24.6@46.7,7.25 ; v1(46.359,-8.247) R2_30.1@47,-8.247 ; v1(46.359,-5.578) R1_30.1@47,-5.578 47.828,-5.578 J4_30.5@47.9,-5.65 ; J4_26.5@47.866,7.25 v1(48.564,7.25) ; v1(49.9,-8.953) J4_30.3@49.9,-8.15 ; v1(50.69,7.276) 50.717,7.25 J4_26.6@51.366,7.25 ; J4_30.6@51.4,-5.65 v1(52.041,-5.65) J4_32.5@52.6,-5.65 ; J4_28.5@52.6,7.25 v1(53.298,7.25) ; v1(54.6,-8.953) J4_32.3@54.6,-8.15 ; v1(55.424,7.276) 55.45,7.25 J4_28.6@56.1,7.25 ; J4_32.6@56.102,-5.721 56.246,-5.578 R2_32.1@57,-5.578 v1(57.641,-5.578) ; R1_32.1@57,-8.247 v1(57.641,-8.247)
  Top Layer w0.508: R2_6.1@0.826,3.265 v1(0.826,4.057) ; R1_6.1@3.504,3.265 v1(4.282,3.265) ; R2_8.1@5.526,3.269 v1(5.526,4.061) ; R1_8.1@8.204,3.269 v1(8.982,3.269) ; R2_10.1@10.226,3.269 v1(10.226,4.061) ; R1_10.1@12.904,3.269 v1(13.682,3.269) ; R2_12.1@14.926,3.269 v1(14.926,4.061) ; R1_12.1@17.604,3.269 v1(18.382,3.269) ; R2_14.1@19.626,3.269 v1(19.626,4.061) ; R1_14.1@22.304,3.269 v1(23.082,3.269) ; R2_16.1@24.322,3.265 v1(24.322,4.057) ; R1_16.1@27,3.265 v1(27.778,3.265) ; R2_18.1@29.051,3.265 v1(29.051,4.057) ; R1_18.1@31.729,3.265 v1(32.507,3.265) ; R2_20.1@33.751,3.265 v1(33.751,4.057) ; R1_20.1@36.429,3.265 v1(37.207,3.265) ; R2_22.1@38.451,3.29 v1(38.451,4.082) ; R1_22.1@41.129,3.29 v1(41.907,3.29) ; R2_24.1@43.126,3.265 v1(43.126,4.057) ; R1_24.1@45.804,3.265 v1(46.582,3.265) ; R2_26.1@47.792,3.294 v1(47.792,4.086) ; R1_26.1@50.47,3.294 v1(51.248,3.294) ; R2_28.1@52.526,3.269 v1(52.526,4.061) ; R1_28.1@55.204,3.269 v1(55.982,3.269)
  Bottom Layer w0.1: R1_1.1@-0.072,-8.45 R1_1.1@0,-8.378 ; R2_1.1@-0.072,-5.772 R2_1.1@0,-5.7 ; J4_1.6@0.85,-5.7 J4_1.6@0.9,-5.65 ; J4_3.5@9.15,-5.7 J4_3.5@9.1,-5.65 J4_3.5@9.2,-5.55 ; R1_3.1@10,-5.55 R1_3.1@10.003,-5.547 ; R2_3.1@10.008,-8.378 R2_3.1@10.108,-8.278 ; v1(46.359,-8.247) 46.362,-8.25 v1@46.364,-8.252 ; v1(46.359,-5.578) v1@46.372,-5.564 ; J4_29.6@47.814,-5.564 J4_29.6@47.9,-5.65 ; J4_31.5@56.1,-5.65 J4_31.5@56.149,-5.6 ; v1@57.61,-8.278 v1(57.641,-8.247) ; v1@57.618,-5.6 v1(57.641,-5.578)
  Bottom Layer w0.254: J4_5.3@2.4,4.75 v1(2.4,5.722) ; J4_7.3@7.1,4.75 v1(7.1,5.722) ; J4_9.3@11.8,4.75 v1(11.8,5.722) ; J4_11.3@16.5,4.75 v1(16.5,5.722) ; J4_13.3@21.2,4.75 v1(21.2,5.722) ; J4_15.3@25.9,4.75 v1(25.9,5.722) ; J4_17.3@30.6,4.75 v1(30.6,5.722) ; J4_19.3@35.3,4.75 v1(35.3,5.722) ; J4_21.3@40,4.75 v1(40,5.722) ; J4_23.3@44.7,4.644 v1(44.7,5.616) ; J4_25.3@49.4,4.75 v1(49.4,5.722) ; J4_27.3@54.1,4.75 v1(54.1,5.722)
  Bottom Layer w0.3: v1(-0.7,-5.522) -0.322,-5.522 R2_1.1@-0.072,-5.772 ; v1(-0.641,-8.184) -0.338,-8.184 R1_1.1@-0.072,-8.45 ; R1_1.1@-0.061,-8.316 R1_1.1@0,-8.378 ; R2_1.1@0,-5.7 J4_1.6@0.85,-5.7 ; v1(0.826,4.057) 0.9,3.983 R1_5.1@0.9,3.315 ; J4_5.6@0.9,7.25 v1(1.598,7.25) ; v1(2.2,-9) 2.4,-8.8 J4_1.3@2.4,-8.15 ; R2_5.1@3.578,3.315 3.628,3.265 v1(4.282,3.265) ; v1(3.724,7.276) 3.75,7.25 J4_5.5@4.4,7.25 ; J4_1.5@4.4,-5.65 v1(5.041,-5.65) J4_3.6@5.6,-5.65 ; v1(5.526,4.061) 5.526,3.318 R1_7.1@5.55,3.294 ; J4_7.6@5.6,7.25 v1(6.298,7.25) ; v1(6.9,-9) 7.1,-8.8 J4_3.3@7.1,-8.15 ; R2_7.1@8.228,3.294 8.253,3.269 v1(8.982,3.269) ; v1(8.424,7.276) 8.45,7.25 J4_7.5@9.1,7.25 ; J4_3.5@9.2,-5.55 R1_3.1@10,-5.55 ; R1_3.1@10.003,-5.547 v1(10.638,-5.547) ; R2_3.1@10.108,-8.278 v1(10.75,-8.278) ; v1(10.226,4.061) 10.226,3.368 R1_9.1@10.3,3.294 ; J4_9.6@10.3,7.25 v1(10.998,7.25) ; R2_9.1@12.978,3.294 13.003,3.269 v1(13.682,3.269) ; v1(13.124,7.276) 13.15,7.25 J4_9.5@13.8,7.25 ; v1(14.926,4.061) 14.926,3.368 R1_11.1@15,3.294 ; J4_11.6@15,7.25 v1(15.698,7.25) ; R2_11.1@17.678,3.294 17.703,3.269 v1(18.382,3.269) ; v1(17.824,7.276) 17.85,7.25 J4_11.5@18.5,7.25 ; v1(19.626,4.061) 19.626,3.368 R1_13.1@19.7,3.294 ; J4_13.6@19.7,7.25 v1(20.398,7.25) ; R2_13.1@22.378,3.294 22.403,3.269 v1(23.082,3.269) ; v1(22.524,7.276) 22.55,7.25 J4_13.5@23.2,7.25 ; v1(24.322,4.057) 24.322,3.372 R1_15.1@24.4,3.294 ; J4_15.6@24.4,7.25 v1(25.095,7.25) ; R2_15.1@27.078,3.294 27.108,3.265 v1(27.778,3.265) ; v1(27.221,7.276) 27.247,7.25 J4_15.5@27.9,7.25 ; v1(29.051,4.057) 29.051,3.343 R1_17.1@29.1,3.294 ; J4_17.6@29.1,7.25 v1(29.798,7.25) ; R2_17.1@31.778,3.294 31.808,3.265 v1(32.507,3.265) ; v1(31.924,7.276) 31.95,7.25 J4_17.5@32.6,7.25 ; v1(33.751,4.057) 33.751,3.364 R1_19.1@33.8,3.315 ; J4_19.6@33.8,7.25 v1(34.498,7.25) ; R2_19.1@36.478,3.315 36.528,3.265 v1(37.207,3.265) ; v1(36.624,7.276) 36.65,7.25 J4_19.5@37.3,7.25 ; v1(38.451,4.082) 38.451,3.393 R1_21.1@38.55,3.294 ; J4_21.6@38.5,7.25 v1(39.198,7.25) ; R2_21.1@41.228,3.294 41.232,3.29 v1(41.907,3.29) ; v1(41.324,7.276) 41.35,7.25 J4_21.5@42,7.25 ; v1(43.126,4.057) 43.126,3.39 R1_23.1@43.222,3.294 ; J4_23.6@43.2,7.25 v1(43.898,7.25) ; R2_23.1@45.9,3.294 45.929,3.265 v1(46.582,3.265) ; v1(46.024,7.276) 46.05,7.25 J4_23.5@46.7,7.25 ; v1@46.362,-8.25 R1_29.1@47.105,-8.25 ; v1@46.372,-5.564 R2_29.1@47.105,-5.564 J4_29.6@47.814,-5.564 ; v1(47.792,4.086) 47.792,3.374 R1_25.1@47.872,3.294 ; J4_25.6@47.9,7.25 v1(48.564,7.25) ; v1(49.2,-9) 49.4,-8.8 J4_29.3@49.4,-8.15 ; R2_25.1@50.55,3.294 v1(51.248,3.294) ; v1(50.69,7.276) 50.717,7.25 J4_25.5@51.366,7.25 ; J4_29.5@51.4,-5.65 v1(52.041,-5.65) J4_31.6@52.6,-5.65 ; v1(52.526,4.061) 52.526,3.372 R1_27.1@52.604,3.294 ; J4_27.6@52.6,7.25 v1(53.298,7.25) ; v1(53.9,-9) 54.1,-8.8 J4_31.3@54.1,-8.15 ; R2_27.1@55.282,3.294 55.307,3.269 v1(55.982,3.269) ; v1(55.424,7.276) 55.45,7.25 J4_27.5@56.1,7.25 ; J4_31.5@56.149,-5.6 R1_31.1@57,-5.6 v1@57.618,-5.6 ; R2_31.1@57,-8.278 v1@57.61,-8.278
SENSOR_A1: J4_1.1 J5.1 R2_1.2 | length 28.2
  Top Layer w0.1: v1(18.74,-4.912) J5.1@18.74,-4.18
  Bottom Layer w0.1: J4_1.1@3.4,-8.15 3.4,-7.108 2.892,-6.6 R2_1.2@0,-6.6 -0.615,-6.6 -1.1,-6.115 -1.1,-4.924 -0.476,-4.3 12.686,-4.3 13.298,-4.912 v1(18.74,-4.912)
SENSOR_A2: J4_2.1 J5.4 R2_2.2 | length 30.6
  Top Layer w0.1: J4_2.1@1.9,-8.15 1.9,-7.4 1.5,-7 0.847,-7 0.563,-7.284 R2_2.2@0,-7.284 -1.219,-7.284 -2.053,-6.45 -2.053,-4.493 -0.66,-3.1 5.4,-3.1 6.8,-1.7 16.14,-1.7 16.5,-2.06 18.904,-2.06 19.14,-1.824 J5.4@19.14,-1.1
SENSOR_A3: J4_3.1 J5.7 R2_3.2 | length 17
  Top Layer w0.1: v1(19.94,-4.912) J5.7@19.94,-4.18
  Bottom Layer w0.1: J4_3.1@8.1,-8.15 8.1,-7.367 8.45,-7.017 9.017,-7.017 9.478,-7.478 R2_3.2@10.008,-7.478 13.583,-7.478 ; 13.586,-7.476 13.583,-7.478 ; v1(19.94,-4.912) 20.374,-4.912 20.827,-5.365 20.827,-6.192 19.541,-7.478 13.583,-7.478
SENSOR_A4: J4_4.1 J5.10 R2_4.2 | length 18
  Top Layer w0.1: J4_4.1@6.6,-8.15 6.6,-7 7.194,-6.406 R2_4.2@9.997,-6.406 12.774,-6.406 16.58,-2.6 19.965,-2.6 20.34,-2.225 J5.10@20.34,-1.1
SENSOR_A5: J4_5.1 J5.13 R2_5.2 | length 25.5
  Top Layer w0.1: v1(21.14,-4.912) J5.13@21.14,-4.18
  Bottom Layer w0.1: J4_5.1@3.4,4.75 3.4,4.036 R2_5.2@2.678,3.315 5.7,0.293 5.7,-1.663 6.877,-2.84 13.765,-2.84 14.925,-4 19.04,-4 19.465,-4.425 20.625,-4.425 21.112,-4.912 v1(21.14,-4.912) v1@21.112,-4.94
SENSOR_A6: J4_6.1 J5.16 R2_6.2 | length 25.2
  Top Layer w0.1: J4_6.1@1.9,4.75 1.9,4.05 1.729,3.879 1.729,3.268 R2_6.2@1.726,3.265 1.726,2.238 4.964,-1 17.5,-1 18.56,0.06 21.34,0.06 21.54,-0.14 J5.16@21.54,-1.1
SENSOR_A7: J4_7.1 J5.19 R2_7.2 | length 22.4
  Top Layer w0.1: v1(22.315,-4.965) 22.34,-4.94 J5.19@22.34,-4.18
  Bottom Layer w0.1: J4_7.1@8.1,4.75 8.1,4.066 R2_7.2@7.328,3.294 7.308,3.274 8.347,2.235 8.347,0.636 9.658,-0.675 13.154,-0.675 15.253,-2.775 20.864,-2.775 21.306,-3.217 21.306,-3.956 v1(22.315,-4.965)
SENSOR_A8: J4_8.1 J5.22 R2_8.2 | length 21.7
  Top Layer w0.1: J4_8.1@6.6,4.75 6.6,4.036 6.429,3.865 6.429,3.272 R2_8.2@6.426,3.269 6.426,1.584 8,0.01 17.036,0.01 17.626,0.6 21.986,0.6 22.74,-0.154 J5.22@22.74,-1.1
SENSOR_A9: J4_9.1 J5.25 R2_9.2 | length 18.8
  Top Layer w0.1: v1(23.54,-4.92) J5.25@23.54,-4.18
  Bottom Layer w0.1: J4_9.1@12.8,4.75 12.8,4.016 R2_9.2@12.078,3.294 13.15,2.222 13.15,0.925 16.252,-2.177 21.887,-2.177 22.675,-2.964 22.675,-4.055 v1(23.54,-4.92)
SENSOR_A10: J4_10.1 J5.28 R2_10.2 | length 17.4
  Top Layer w0.1: J4_10.1@11.3,4.75 11.3,4.125 11.126,3.951 R2_10.2@11.126,3.269 11.126,2.8 11.24,2.686 11.24,2.16 12.4,1 16.9,1 17.025,1.125 22.7,1.125 23.94,-0.115 J5.28@23.94,-1.1
SENSOR_A11: J4_11.1 J5.31 R2_11.2 | length 16.1
  Top Layer w0.1: v1(24.74,-4.92) J5.31@24.74,-4.18
  Bottom Layer w0.1: J4_11.1@17.5,4.75 17.5,4.016 R2_11.2@16.778,3.294 17.678,2.394 17.678,-0.203 18.875,-1.4 22.375,-1.4 23.94,-2.965 23.94,-4.09 24.74,-4.89 v1(24.74,-4.92)
SENSOR_A12: J4_12.1 J5.34 R2_12.2 | length 13.7
  Top Layer w0.1: J4_12.1@16,4.75 16,4.036 15.826,3.862 R2_12.2@15.826,3.269 15.826,2.474 16.4,1.9 19.96,1.9 20.21,1.65 23.425,1.65 25.14,-0.065 J5.34@25.14,-1.1
SENSOR_A13: J4_13.1 J5.37 R2_13.2 | length 23
  Top Layer w0.1: v1(25.94,-5.557) J5.37@25.94,-4.18
  Bottom Layer w0.1: R2_13.2@21.478,3.294 22.2,4.016 J4_13.1@22.2,4.75 22.2,5.7 21.598,6.302 20.191,6.302 19.175,5.286 19.175,2.433 19.29,2.318 19.29,0.71 19.775,0.225 20.125,0.225 20.525,-0.175 20.525,-0.473 20.852,-0.8 23.275,-0.8 25.94,-3.465 v1(25.94,-5.557)
SENSOR_A14: J4_14.1 J5.40 R2_14.2 | length 10.2
  Top Layer w0.1: R2_14.2@20.526,3.269 20.526,2.61 20.952,2.184 24.066,2.184 26.34,-0.09 J5.40@26.34,-1.1 ; R2_14.2@20.529,3.272 20.529,3.89 20.7,4.061 J4_14.1@20.7,4.75
SENSOR_A15: J4_15.1 J5.43 R2_15.2 | length 11.8
  Top Layer w0.1: v1(27.14,-4.92) J5.43@27.14,-4.18
  Bottom Layer w0.1: J4_15.1@26.9,4.75 26.9,4.016 R2_15.2@26.178,3.294 25.878,2.994 25.878,0.778 25.35,0.25 25.35,-1.05 27.14,-2.84 v1(27.14,-4.92)
SENSOR_A16: J4_16.1 J5.46 R2_16.2 | length 7.1
  Top Layer w0.1: J4_16.1@25.397,4.75 25.397,4.011 25.222,3.837 R2_16.2@25.222,3.265 25.222,2.613 25.636,2.2 25.94,2.2 27.54,0.6 J5.46@27.54,-1.1
SENSOR_A17: J4_17.1 J5.49 R2_17.2 | length 16.7
  Top Layer w0.1: J5.49@28.34,-4.18 v1(28.34,-3.42)
  Bottom Layer w0.1: v1(28.34,-3.42) 28.34,-1.663 27.778,-1.101 27.778,1.825 28.625,2.672 28.625,5.485 29.442,6.302 31.328,6.302 31.6,6.03 J4_17.1@31.6,4.75 31.6,4.016 R2_17.2@30.878,3.294
SENSOR_A18: J4_18.1 J5.52 R2_18.2 | length 6.4
  Top Layer w0.1: J5.52@28.74,-1.1 28.74,1.197 29.951,2.408 R2_18.2@29.951,3.265 29.951,3.837 30.1,3.986 J4_18.1@30.1,4.75
SENSOR_A19: J4_19.1 J5.55 R2_19.2 | length 14.7
  Top Layer w0.1: v1(29.54,-4.92) J5.55@29.54,-4.18
  Bottom Layer w0.1: v1(29.54,-4.92) 29.54,-4.508 29.798,-4.25 29.798,-2.177 31.325,-0.65 31.325,-0.2 31.675,0.15 34.175,0.15 34.7,0.675 34.7,1.958 35.129,2.387 35.129,2.865 R2_19.2@35.578,3.315 36.3,4.036 J4_19.1@36.3,4.75
SENSOR_A20: J4_20.1 J5.58 R2_20.2 | length 9.1
  Top Layer w0.1: J5.58@29.94,-1.1 29.94,0.24 32.284,2.584 34.335,2.584 34.651,2.9 R2_20.2@34.651,3.265 34.651,3.862 34.8,4.011 J4_20.1@34.8,4.75
SENSOR_A21: J4_21.1 J5.61 R2_21.2 | length 17.9
  Top Layer w0.1: v1(30.74,-4.912) J5.61@30.74,-4.18
  Bottom Layer w0.1: v1(30.74,-4.912) 30.74,-4.24 31.125,-3.855 31.125,-2.943 32.893,-1.175 38.365,-1.175 39.55,0.01 39.55,1.782 39.768,2 39.768,2.74 40.322,3.294 R2_21.2@40.328,3.294 41,3.966 J4_21.1@41,4.75
SENSOR_A22: J4_22.1 J5.64 R2_22.2 | length 12.6
  Top Layer w0.1: J5.64@31.14,-1.1 31.14,0.2 32.865,1.925 35.565,1.925 36.111,2.471 39,2.471 39.351,2.822 R2_22.2@39.351,3.29 39.351,3.887 39.5,4.036 J4_22.1@39.5,4.75
SENSOR_A23: J4_23.1 J5.67 R2_23.2 | length 20.7
  Top Layer w0.1: v1(31.94,-4.92) J5.67@31.94,-4.18
  Bottom Layer w0.1: v1(31.94,-4.92) 31.94,-4.335 32.297,-3.978 32.297,-3.053 33.56,-1.79 40.41,-1.79 42.85,0.65 43.818,0.65 44.468,1.3 44.468,2.707 45,3.238 R2_23.2@45,3.294 45.7,3.994 J4_23.1@45.7,4.75
SENSOR_A24: J4_24.1 J5.70 R2_24.2 | length 16.2
  Top Layer w0.1: J5.70@32.34,-1.1 32.34,0.121 33.619,1.4 36.075,1.4 36.325,1.65 43.141,1.65 44.026,2.535 R2_24.2@44.026,3.265 44.026,3.912 44.2,4.086 J4_24.1@44.2,4.75
SENSOR_A25: J4_25.1 J5.73 R2_25.2 | length 24.3
  Top Layer w0.1: v1@33.14,-4.93 J5.73@33.14,-4.18 J5.73@33.14,-4.17
  Bottom Layer w0.1: v1(33.14,-4.94) 33.14,-4.435 33.507,-4.068 33.507,-3.229 34.196,-2.54 43.835,-2.54 46.525,0.15 48.323,0.15 49.24,1.067 49.24,2.884 R2_25.2@49.65,3.294 50.4,4.044 J4_25.1@50.4,4.75
SENSOR_A26: J4_26.1 J5.76 R2_26.2 | length 19.6
  Top Layer w0.1: J5.76@33.54,-1.1 33.54,0.063 34.362,0.885 47.044,0.885 48.692,2.533 R2_26.2@48.692,3.294 48.692,3.862 48.866,4.036 J4_26.1@48.866,4.75
SENSOR_A27: J4_27.1 J5.79 R2_27.2 | length 27
  Top Layer w0.1: v1(34.315,-4.912) 34.34,-4.887 J5.79@34.34,-4.18
  Bottom Layer w0.1: v1@34.323,-4.92 v1(34.315,-4.912) 35.277,-3.95 37.9,-3.95 38.432,-3.418 44.729,-3.418 47.146,-1 51.9,-1 53.87,0.97 53.87,2.782 R2_27.2@54.382,3.294 55.1,4.012 J4_27.1@55.1,4.75
SENSOR_A28: J4_28.1 J5.82 R2_28.2 | length 23.6
  Top Layer w0.1: J5.82@34.74,-1.1 34.74,-0.035 35.15,0.375 39.159,0.375 39.734,-0.2 50.691,-0.2 53.426,2.536 R2_28.2@53.426,3.269 ; R2_28.2@53.429,3.272 53.429,3.84 53.6,4.011 J4_28.1@53.6,4.75
SENSOR_A29: J4_29.1 J5.85 R2_29.2 | length 18.4
  Top Layer w0.1: v1(35.515,-4.94) 35.54,-4.915 J5.85@35.54,-4.18
  Bottom Layer w0.1: v1(35.515,-4.94) 35.555,-4.9 36,-4.9 36.607,-5.507 36.607,-6.057 37.55,-7 46.1,-7 46.636,-6.464 R2_29.2@47.105,-6.464 49.728,-6.464 50.4,-7.136 J4_29.1@50.4,-8.15
SENSOR_A30: J4_30.1 J5.88 R2_30.2 | length 17
  Top Layer w0.1: J5.88@35.94,-1.1 35.94,-2.465 36.475,-3 40.035,-3 44.382,-7.347 R2_30.2@47,-7.347 48.714,-7.347 48.9,-7.534 J4_30.1@48.9,-8.15
SENSOR_A31: J4_31.1 J5.91 R2_31.2 | length 32.4
  Top Layer w0.1: v1(36.74,-4.93) J5.91@36.74,-4.18
  Bottom Layer w0.1: v1(36.74,-4.93) 36.75,-4.92 37.273,-4.92 37.86,-5.507 44.301,-5.507 46.608,-3.2 58.252,-3.2 59.4,-4.348 59.4,-6.3 58.322,-7.378 R2_31.2@57,-7.378 55.38,-7.378 55.1,-7.658 J4_31.1@55.1,-8.15
SENSOR_A32: J4_32.1 J5.94 R2_32.2 | length 30.5
  Top Layer w0.1: J5.94@37.14,-1.1 37.14,-2.04 37.5,-2.4 47.372,-2.4 49.336,-4.364 57.899,-4.364 58.3,-4.765 58.3,-5.757 57.58,-6.478 R2_32.2@57,-6.478 54.304,-6.478 53.6,-7.182 J4_32.1@53.6,-8.15
SENSOR_B1: J4_1.2 J5.3 R1_1.2 | length 32
  Top Layer w0.1: v1(19.14,-5.522) J5.3@19.14,-4.18
  Bottom Layer w0.1: J4_1.2@2.9,-8.15 2.9,-7.313 2.604,-7.017 1.187,-7.017 0.726,-7.478 R1_1.2@0,-7.478 -0.706,-7.478 -1.6,-6.584 -1.6,-4.515 -0.505,-3.42 13.116,-3.42 14.061,-4.364 18.825,-4.364 19.14,-4.679 v1(19.14,-5.522)
SENSOR_B2: J4_2.2 J5.6 R1_2.2 | length 29.6
  Top Layer w0.1: J4_2.2@2.4,-8.15 2.4,-7.15 1.7,-6.45 R1_2.2@0,-6.45 -1.069,-6.45 -1.4,-6.119 -1.4,-4.7 -0.6,-3.9 5.6,-3.9 7.2,-2.3 19.3,-2.3 19.54,-2.06 J5.6@19.54,-1.1
SENSOR_B3: J4_3.2 J5.9 R1_3.2 | length 16.1
  Top Layer w0.1: v1(20.34,-5.547) J5.9@20.34,-4.18
  Bottom Layer w0.1: J4_3.2@7.6,-8.15 7.6,-7.002 8.152,-6.45 R1_3.2@10,-6.45 10.491,-6.45 10.841,-6.8 19.087,-6.8 v1(20.34,-5.547)
SENSOR_B4: J4_4.2 J5.12 R1_4.2 | length 18.1
  Top Layer w0.1: J4_4.2@7.1,-8.15 7.1,-7.204 7.357,-6.947 8.404,-6.947 8.741,-7.284 R1_4.2@9.997,-7.284 12.495,-7.284 16.879,-2.9 20.198,-2.9 20.74,-2.358 J5.12@20.74,-1.1
SENSOR_B5: J4_5.2 J5.15 R1_5.2 | length 30.4
  Top Layer w0.1: v1(21.54,-5.557) J5.15@21.54,-4.18
  Bottom Layer w0.1: R1_5.2@1.8,3.315 2.486,4 2.793,4 2.9,4.107 J4_5.2@2.9,4.75 2.9,5.364 3.264,5.728 4.373,5.728 4.85,5.251 4.85,2.05 7.3,-0.4 7.3,-1.2 7.9,-1.8 13.445,-1.8 15.11,-3.465 18.955,-3.465 19.49,-4 20.838,-4 21.54,-4.702 v1(21.54,-5.557)
SENSOR_B6: J4_6.2 J5.18 R1_6.2 | length 24.7
  Top Layer w0.1: J4_6.2@2.4,4.75 2.4,4.093 2.604,3.89 R1_6.2@2.604,3.265 2.604,2.196 5.3,-0.5 17.219,-0.5 18.019,0.3 21.65,0.3 21.94,0.01 J5.18@21.94,-1.1
SENSOR_B7: J4_7.2 J5.21 R1_7.2 | length 28.3
  Top Layer w0.1: v1(22.718,-5.557) 22.718,-4.202 J5.21@22.74,-4.18
  Bottom Layer w0.1: R1_7.2@6.5,3.422 7.078,4 7.493,4 7.6,4.107 J4_7.2@7.6,4.75 7.6,5.425 7.903,5.728 9.308,5.728 9.576,5.46 9.576,2.852 9.247,2.522 9.247,1.085 10.282,0.05 13.202,0.05 15.717,-2.465 21.54,-2.465 22.375,-3.3 22.375,-4.225 22.95,-4.8 22.95,-5.324 v1(22.718,-5.557)
SENSOR_B8: J4_8.2 J5.24 R1_8.2 | length 20.8
  Top Layer w0.1: J4_8.2@7.1,4.75 7.1,4.093 7.304,3.889 R1_8.2@7.304,3.269 7.304,2.135 8.918,0.521 17.058,0.521 17.396,0.86 22.34,0.86 23.14,0.06 J5.24@23.14,-1.1
SENSOR_B9: J4_9.2 J5.27 R1_9.2 | length 24.3
  Top Layer w0.1: v1(23.94,-5.547) J5.27@23.94,-4.18
  Bottom Layer w0.1: R1_9.2@11.2,3.294 11.906,4 12.193,4 12.3,4.107 J4_9.2@12.3,4.75 12.3,5.399 12.628,5.728 13.773,5.728 14.082,5.419 14.082,3.103 14.05,3.071 14.05,1.016 16.856,-1.79 22.165,-1.79 23.55,-3.175 23.55,-4.364 23.94,-4.754 v1(23.94,-5.547)
SENSOR_B10: J4_10.2 J5.30 R1_10.2 | length 17.1
  Top Layer w0.1: J4_10.2@11.8,4.75 11.8,4.1 12.004,3.896 R1_10.2@12.004,3.269 12.04,3.233 12.04,2.174 12.814,1.4 23.075,1.4 24.34,0.135 J5.30@24.34,-1.1
SENSOR_B11: J4_11.2 J5.33 R1_11.2 | length 21.6
  Top Layer w0.1: v1(25.14,-5.557) J5.33@25.14,-4.18
  Bottom Layer w0.1: R1_11.2@15.9,3.281 R1_11.2@15.9,3.294 16.606,4 16.893,4 17,4.107 J4_11.2@17,4.75 17,5.488 17.24,5.728 18.473,5.728 18.825,5.376 18.825,2.582 18.603,2.36 18.603,0.372 20.1,-1.125 22.825,-1.125 25.14,-3.44 v1(25.14,-5.557)
SENSOR_B12: J4_12.2 J5.36 R1_12.2 | length 13.2
  Top Layer w0.1: J4_12.2@16.5,4.75 16.5,4.118 16.704,3.915 16.704,3.27 16.74,3.233 16.74,2.72 17.1,2.36 19.98,2.36 20.415,1.925 23.725,1.925 25.54,0.11 J5.36@25.54,-1.1
SENSOR_B13: J4_13.2 J5.39 R1_13.2 | length 15.2
  Top Layer w0.1: v1(26.34,-4.94) J5.39@26.34,-4.18
  Bottom Layer w0.1: J4_13.2@21.7,4.75 21.7,4.107 21.593,4 21.306,4 R1_13.2@20.6,3.294 21,2.894 21,2.085 20.7,1.785 20.7,0.675 21.125,0.25 23.65,0.25 24.2,-0.3 24.2,-0.8 26.34,-2.94 v1(26.34,-4.94)
SENSOR_B14: J4_14.2 J5.42 R1_14.2 | length 9.6
  Top Layer w0.1: J4_14.2@21.2,4.75 21.2,4.068 21.404,3.864 R1_14.2@21.404,3.269 21.404,2.894 21.746,2.552 24.177,2.552 26.74,-0.01 J5.42@26.74,-1.1
SENSOR_B15: J4_15.2 J5.45 R1_15.2 | length 15.3
  Top Layer w0.1: J5.45@27.54,-4.18 v1(27.54,-3.42)
  Bottom Layer w0.1: R1_15.2@25.3,3.294 26.006,4 26.293,4 26.4,4.107 J4_15.2@26.4,4.75 26.4,5.46 26.668,5.728 27.722,5.728 28.2,5.25 28.2,2.965 27.15,1.915 27.15,0.5 26.65,0 26.65,-1.125 27.54,-2.015 v1(27.54,-3.42)
SENSOR_B16: J4_16.2 J5.48 R1_16.2 | length 6.7
  Top Layer w0.1: J4_16.2@25.897,4.75 25.897,4.068 26.1,3.865 R1_16.2@26.1,3.265 26.1,2.591 27.94,0.752 J5.48@27.94,-1.1